# EAGLE board A6ECU-6 (EAGLE 7.5.0)
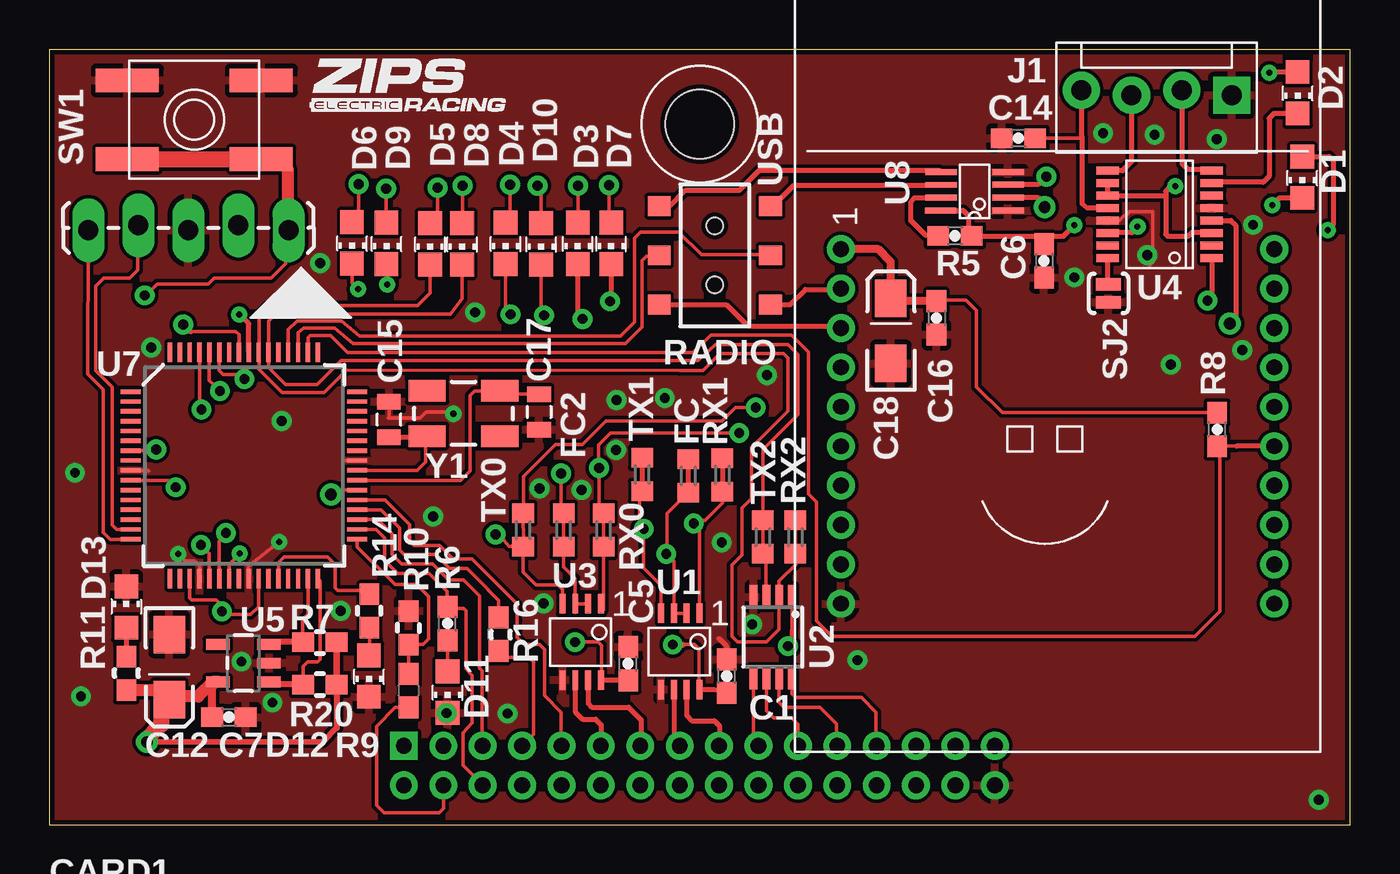
[diagram p0: board, top side]
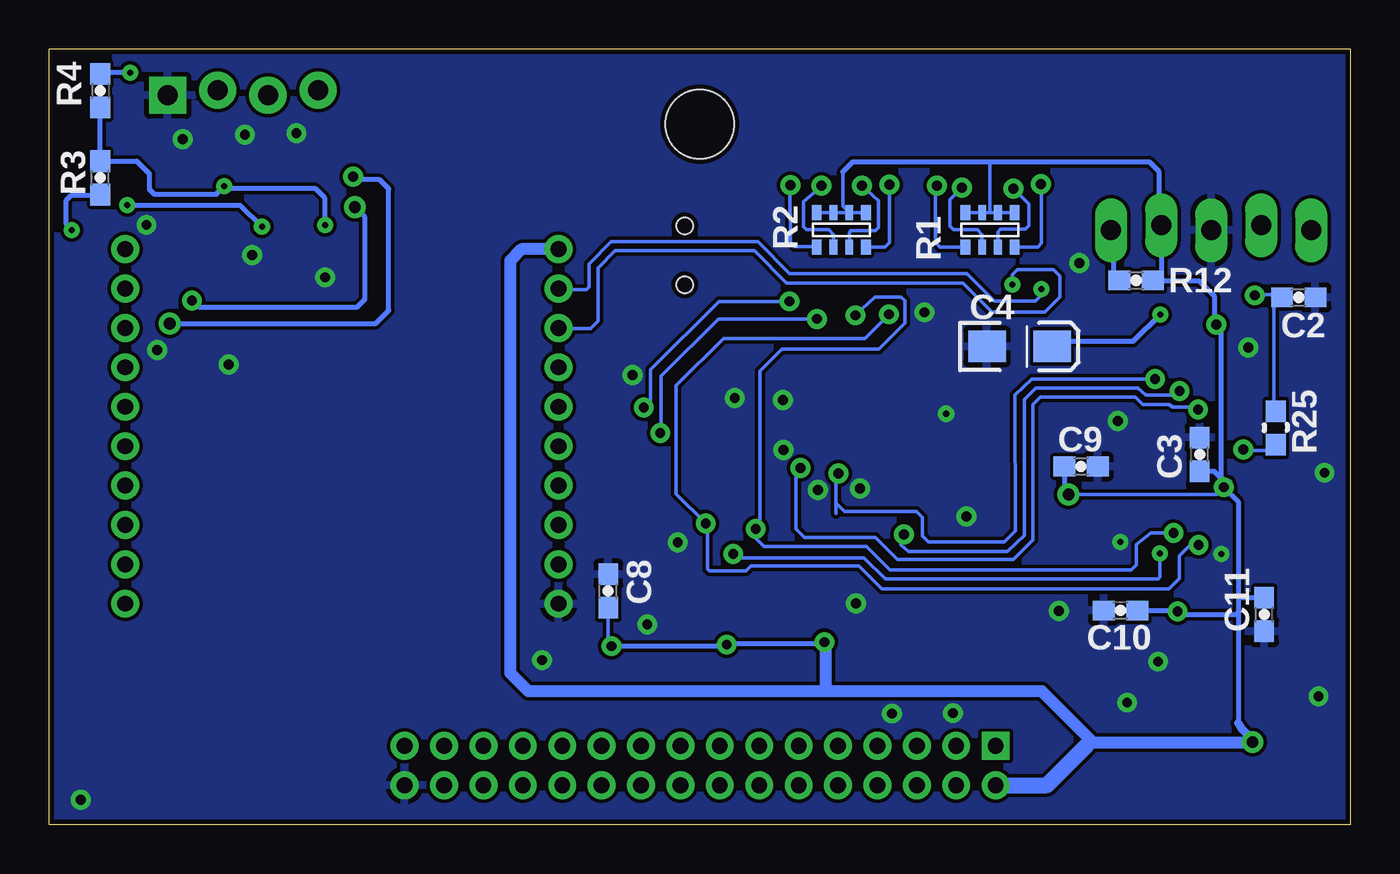
[diagram p1: board, bottom side, seen from below]

Size 66.04 x 39.37 mm. Coordinates in mm from the lower left corner, seen from the top.
Copper layers (1*16): Top 0.035mm / dielectric 1.5mm / Bottom 0.035mm
Design rules "SparkFun *": minimum track width 7mil, minimum drill 12mil, track to track 7mil, track to pad 7mil, pad to pad 7mil, via to via 7mil, smd to smd 7mil, copper to edge 10mil, drill to drill 8mil, minimum pad ring 12mil, minimum via ring 10mil, stop-mask expansion 4mil, vias tented up to drill 25mil, thermal gap 10mil

## Footprints (pad centres in the part's own frame; a part is rotated, then mirrored left to right if it is on the bottom)
0603 = smd 1.1 x 1: 1 -0.85,0; 2 0.85,0
EIA3216-16V = smd 1.9 x 1.6: A 1.65,0; C -1.65,0
0805 = smd 0.8 x 1.2: 1 -0.9,0; 2 0.9,0
CARD-2016 = drill 0.8 square: 1 18,4 | drill 0.8: 2 18,2; 3 20,4; 4 20,2; 5 22,4; 6 22,2; 7 24,4; 8 24,2; 9 26,4; 10 26,2; 11 28,4; 12 28,2; 13 30,4; 14 30,2; 15 32,4; 16 32,2; 17 34,4; 18 34,2; 19 36,4; 20 36,2; 21 38,4; 22 38,2; 23 40,4; 24 40,2; 25 42,4; 26 42,2; 27 44,4; 28 44,2; 29 46,4; 30 46,2; 31 48,4; 32 48,2 | hole 3.5: 33.02,35.56
CHIP_LED0805 = smd 1.2 x 1.2: A 0,-1.05; C 0,1.05
R0603 = smd 1 x 1.1: 1 -0.85,0; 2 0.85,0
1X05_LOCK_LONGPADS = drill 1.016 long: 1 0,0; 2 2.54,-0.254; 3 5.08,0; 4 7.62,-0.254; 5 10.16,0
MOLEX_1X4 = drill 1.016 pad 1.88 square: 1 -3.81,0.127 | drill 1.016 pad 1.88: 2 -1.27,-0.127; 3 1.27,0.127; 4 3.81,-0.127
MNR14 = smd 0.5 x 0.75: 1 -1.25,-0.9; 4 1.25,-0.9; 5 1.25,0.85; 8 -1.25,0.85 | smd 0.4 x 0.75: 2 -0.4,-0.9; 3 0.4,-0.9; 6 0.4,0.85; 7 -0.4,0.85
AYZ0202 = smd 1 x 1.15: 1 -2.5,2.825; 2 0,2.825; 3 2.5,2.825; 4 -2.5,-2.825; 5 0,-2.825; 6 2.5,-2.825 | hole 0.85: 1.5,0; -1.5,0
PAD-JUMPER-2-NO_YES_SILK = smd 0.635 x 1.27: 1 -0.45,0; 2 0.45,0
EVQ-Q2 = smd 3.2 x 1.2: A -3.4,-2; A' 3.4,-2; B -3.4,2; B' 3.4,2
MSOP-8 = smd 0.3 x 1: 1 -0.975,-1.95; 2 -0.325,-1.95; 3 0.325,-1.95; 4 0.975,-1.95; 5 0.975,1.925; 6 0.325,1.925; 7 -0.325,1.925; 8 -0.975,1.925
MSOP8 = smd 0.4 x 1.2: 1 -0.975,-2.05; 2 -0.325,-2.05; 3 0.325,-2.05; 4 0.975,-2.05; 5 0.975,2.05; 6 0.325,2.05; 7 -0.325,2.05; 8 -0.975,2.05
SSOP-16 = smd 0.419 x 1.143: 1 -2.223,-2.642; 2 -1.587,-2.642; 3 -0.953,-2.642; 4 -0.318,-2.642; 5 0.318,-2.642; 6 0.953,-2.642; 7 1.587,-2.642; 8 2.223,-2.642; 9 2.223,2.642; 10 1.587,2.642; 11 0.953,2.642; 12 0.318,2.642; 13 -0.318,2.642; 14 -0.953,2.642; 15 -1.587,2.642; 16 -2.223,2.642
SOT23-5 = smd 0.55 x 1.2: 1 -0.95,-1.3; 2 0,-1.3; 3 0.95,-1.3; 4 0.95,1.3; 5 -0.95,1.3
RM024-TH = drill 0.8: 1 9,11; 2 7,11; 3 5,11; 4 3,11; 5 1,11; 6 -1,11; 7 -3,11; 8 -5,11; 9 -7,11; 10 -9,11; 11 -9,-11; 12 -7,-11; 13 -5,-11; 14 -3,-11; 15 -1,-11; 16 1,-11; 17 3,-11; 18 5,-11; 19 7,-11; 20 9,-11
TQFP-64 = smd 0.22 x 1: 1 -3.75,-5.75; 2 -3.25,-5.75; 3 -2.75,-5.75; 4 -2.25,-5.75; 5 -1.75,-5.75; 6 -1.25,-5.75; 7 -0.75,-5.75; 8 -0.25,-5.75; 9 0.25,-5.75; 10 0.75,-5.75; 11 1.25,-5.75; 12 1.75,-5.75; 13 2.25,-5.75; 14 2.75,-5.75; 15 3.25,-5.75; 16 3.75,-5.75; 33 3.75,5.75; 34 3.25,5.75; 35 2.75,5.75; 36 2.25,5.75; 37 1.75,5.75; 38 1.25,5.75; 39 0.75,5.75; 40 0.25,5.75; 41 -0.25,5.75; 42 -0.75,5.75; 43 -1.25,5.75; 44 -1.75,5.75; 45 -2.25,5.75; 46 -2.75,5.75; 47 -3.25,5.75; 48 -3.75,5.75 | smd 1 x 0.22: 17 5.75,-3.75; 18 5.75,-3.25; 19 5.75,-2.75; 20 5.75,-2.25; 21 5.75,-1.75; 22 5.75,-1.25; 23 5.75,-0.75; 24 5.75,-0.25; 25 5.75,0.25; 26 5.75,0.75; 27 5.75,1.25; 28 5.75,1.75; 29 5.75,2.25; 30 5.75,2.75; 31 5.75,3.25; 32 5.75,3.75; 49 -5.75,3.75; 50 -5.75,3.25; 51 -5.75,2.75; 52 -5.75,2.25; 53 -5.75,1.75; 54 -5.75,1.25; 55 -5.75,0.75; 56 -5.75,0.25; 57 -5.75,-0.25; 58 -5.75,-0.75; 59 -5.75,-1.25; 60 -5.75,-1.75; 61 -5.75,-2.25; 62 -5.75,-2.75; 63 -5.75,-3.25; 64 -5.75,-3.75
VFSOP-8 = smd 0.3 x 1.6: 1 -0.98,-1.7; 2 -0.33,-1.7; 3 0.33,-1.7; 4 0.98,-1.7; 5 0.97,1.69; 6 0.325,1.7; 7 -0.33,1.7; 8 -0.98,1.71
CRYSTAL-SMD-5X3 = smd 1.9 x 1.1: 1 -1.85,-1.15; 2 1.85,-1.15; 3 1.85,1.15; 4 -1.85,1.15

## Placement (x,y rotation side)
C1  0.1UF  [0603]  34.39,7.54 90 top
C2  0.1UF  [0603]  2.62,26.77 0 bottom
C3  0.1UF  [0603]  7.65,18.8 90 bottom
C4  10UF  [EIA3216-16V]  16.79,24.28 0 bottom
C5  0.1UF  [0603]  29.39,8.18 90 top
C6  0.1UF  [0603]  50.5,28.63 270 top
C7  0.1UF  [0603]  9.12,5.46 0 top
C8  0.1UF  [0603]  37.67,11.86 90 bottom
C9  0.1UF  [0603]  13.67,18.19 0 bottom
C10  0.1UF  [0603]  11.66,10.87 180 bottom
C11  0.1UF  [0603]  4.37,10.67 90 bottom
C12  10UF  [EIA3216-16V]  6.1,8 270 top
C14  0.1UF  [0603]  49.2,34.85 180 top
C15  12PF  [0805]  17.25,20.57 90 top
C16  0.1UF  [0603]  45.03,25.73 270 top
C17  12PF  [0805]  24.87,20.96 270 top
C18  10UF  [EIA3216-16V]  42.72,25.07 90 top
CARD1  CARD-2016CARD  [CARD-2016]  0,0 0 top
D1  RED  [CHIP_LED0805]  63.6,32.87 180 top
D2  GREEN  [CHIP_LED0805]  63.37,37.16 180 top
D3  RED  [CHIP_LED0805]  26.82,29.51 180 top
D4  RED  [CHIP_LED0805]  23.16,29.51 180 top
D5  RED  [CHIP_LED0805]  19.33,29.49 180 top
D6  RED  [CHIP_LED0805]  15.37,29.54 180 top
D7  GREEN  [CHIP_LED0805]  28.52,29.51 180 top
D8  GREEN  [CHIP_LED0805]  20.95,29.49 180 top
D9  GREEN  [CHIP_LED0805]  17.12,29.51 180 top
D10  GREEN  [CHIP_LED0805]  24.97,29.49 180 top
D11  ORANGE  [CHIP_LED0805]  20.22,6.73 180 top
D12  AMBER  [CHIP_LED0805]  16.23,7.54 180 top
D13  GREEN  [CHIP_LED0805]  3.91,11.05 0 top
FC  TESTPOINT  [R0603]  32.44,17.7 90 top
FC2  TESTPOINT  [R0603]  26.11,14.96 90 top
ICSP  ICSP  [1X05_LOCK_LONGPADS]  12.14,30.18 180 top
J1  M4_1X4_LOCK  [MOLEX_1X4]  56.21,37.16 180 top
R1  RN-4_1K  [MNR14]  18.29,30.23 0 bottom
R2  RN-4_1K  [MNR14]  25.83,30.23 0 bottom
R3  1K  [0603]  63.45,32.84 90 bottom
R4  1K  [0603]  63.45,37.26 270 bottom
R5  1K  [0603]  45.97,29.9 0 top
R6  1K  [0603]  20.22,10.21 90 top
R7  2k  [0603]  13.74,9.27 0 top
R8  1K  [0603]  59.28,20.07 90 top
R9  30k  [0603]  18.24,6.81 270 top
R10  3k  [0603]  18.24,9.99 270 top
R11  499  [0603]  3.91,7.68 270 top
R12  10K  [0603]  10.87,27.64 0 bottom
R14  499  [0603]  16.26,10.85 90 top
R16  1k  [0603]  22.81,9.68 90 top
R20  2k  [0603]  13.74,7.11 0 top
R25  499  [0603]  3.78,20.14 270 bottom
RX0  TESTPOINT  [R0603]  28.14,14.96 90 top
RX1  TESTPOINT  [R0603]  34.16,17.75 90 top
RX2  TESTPOINT  [R0603]  37.87,14.61 90 top
S1  DPDT  [AYZ0202]  33.78,28.91 270 top
SJ2  [PAD-JUMPER-2-NO_YES_SILK]  53.77,26.97 90 top
SW1  SPST_TACT-EVQQ2  [EVQ-Q2]  7.37,35.79 180 top
TX0  TESTPOINT  [R0603]  24.05,14.96 90 top
TX1  TESTPOINT  [R0603]  30.1,17.78 90 top
TX2  TESTPOINT  [R0603]  36.22,14.61 90 top
U1  SN75HVD08DRMSOP  [MSOP-8]  32.03,8.79 180 top
U2  ISL83077MSOP  [MSOP8]  36.73,9.53 180 top
U3  SN75HVD08DRMSOP  [MSOP-8]  27.03,9.27 180 top
U4  FT230X  [SSOP-16]  56.36,30.99 90 top
U5  24LC00T-I/OT  [SOT23-5]  9.86,8.2 90 top
U6  RM024  [RM024-TH]  51.18,20.22 90 top
U7  DSPIC33EP256GM306  [TQFP-64]  9.88,18.24 270 top
U8  SN74LVC2G241  [VFSOP-8]  46.96,32.16 90 top
U$1  INDPK1  [PICKIT-PIN-1]  12.78,28.28 180 top
U$2  LOGO16-2-M  [2016-2-LOGO-M]  13.13,36.14 0 top
Y1  12Mhz  [CRYSTAL-SMD-5X3]  21.03,20.88 180 top

## Library data of the parts
C1-C3 C5-C11 C14 C16 = FSAE Electric; PARTNO: CC0603ZRY5V9BB104
C4 C12 C18 = FSAE Electric; PARTNO: T491A106M016AT
C15 C17 = FSAE Electric; PARTNO: CL21C120JBANNNC
CARD1 = FSAE Electric
D1 D3-D6 = FSAE Electric; PARTNO: LH R974-LP-1
D2 D7-D10 D13 = FSAE Electric; PARTNO: LTST-S220GKT
D11 = FSAE Electric; PARTNO: LTST-C170KFKT
D12 = FSAE Electric; PARTNO: HSMA-C170
FC FC2 RX0 RX1 RX2 TX1 TX2 = DFT2
ICSP = SparkFun-Connectors
J1 = FSAE Electric; PARTNO: 0022232041
R1 R2 = FSAE Electric; PARTNO: MNR14ERAPJ102
R3-R6 R8 = FSAE Electric; PARTNO: RC0603JR-071KL
R7 R20 = FSAE Eletric; PARTNO: ERJ-3EKF2001V
R9 = FSAE Eletric; PARTNO: RC0603FR-0730KL
R10 = FSAE Eletric; PARTNO: RC0603FR-0710KL
R11 R14 R25 = FSAE Eletric; PARTNO: RC0603FR-07499RL
R12 = FSAE Electric; PARTNO: RC0603FR-0710KL
R16 = FSAE Eletric; PARTNO: RC0603JR-071KL
S1 = SparkFun-Electromechanical; PARTNO: AYZ0202AGRLC; PROD_ID: SWCH-08179
SJ2 = SparkFun-Passives
SW1 = adafruit; PARTNO: EVQ-Q2F03W
TX0 = DFT2; PARTNO: 1625854-3
U1 U3 = FSAE Electric; PARTNO: ISL83072EIUZA-T
U2 = NASA_LIB; PARTNO: ISL83072EIUZA-T
U4 = FSAE Electric; PARTNO: FT230XS-R
U5 = FSAE Eletric; PARTNO: 24LC00T-I/OT
U6 U$1 = FSAE Eletric
U7 = FSAE Electric; PARTNO: DSPIC33EP256GM306-I/PT
U8 = FSAE Electric; PARTNO: SN74LVC2G241DCUR
U$2 = Pic
Y1 = SparkFun-FreqCtrl

## Nets
3V: C6.1 R3.2 R4.2 R5.2 U4.3 U4.10 U4.11 U8.8
+3V3: C1.1 C3.1 C5.1 C7.1 C8.1 C9.1 C10.1 C11.2 C12.A C16.1 C18.A CARD1.2 ICSP.2 R1.5 R1.6 R1.7 R1.8 R2.5 R2.6 R2.7 R2.8 R7.2 R8.2 R11.2 R12.2 R20.2 U1.8 U2.1 U3.8 U5.5 U6.1 U7.10 U7.19 U7.26 U7.38 U7.57
BRAKELIGHT: CARD1.5 U7.35
ECU-SS-IN: CARD1.4 R9.2
GND: C1.2 C2.2 C3.2 C4.C C5.2 C6.2 C7.2 C8.2 C9.2 C10.2 C11.1 C12.C C14.2 C15.2 C16.2 C17.2 C18.C CARD1.32 D11.C D12.C D13.C ICSP.3 J1.1 R10.1 SJ2.1 SW1.A SW1.A' U1.5 U2.4 U3.5 U4.5 U4.13 U5.2 U6.10 U7.9 U7.20 U7.25 U7.41 U8.1 U8.4
HORN: CARD1.7 R16.1
HORNEN: CARD1.9 U7.37
INRG: R8.1 U6.15 U7.50
N$1: D7.A R2.1
N$2: R14.2 U7.28
N$3: D13.A R11.1
N$4: D2.A R4.1
N$5: D3.A R2.2
N$6: D4.A R2.4
N$7: D10.A R2.3
N$8: D8.A R1.1
N$9: D5.A R1.2
N$10: D6.A R1.4
N$11: D9.A R1.3
N$12: D11.A R6.1
N$13: C15.1 U7.40 Y1.3
N$14: C17.1 U7.39 Y1.1
N$15: D12.A R14.1
N$16: R7.1 U5.3 U7.31
N$17: SJ2.2 U4.16
N$18: D1.A R3.1
N$19: D2.C U4.7
N$20: D1.C U4.14
N$21: U4.4 U8.3
N$22: C2.1 ICSP.1 R12.1 R25.1 SW1.B SW1.B'
N$24: U4.1 U8.2
N$28: J1.3 U4.9
N$32: R20.1 U5.1 U7.32
N$54: J1.2 U4.8
N$69: R5.1 U8.7
N$85: C14.1 J1.4 U4.12
N$87: R25.2 U7.7
N$88: C4.A U7.56
N$90: ICSP.4 U7.15
N$91: ICSP.5 U7.16
RS485-1-A: CARD1.11 U3.6
RS485-1-B: CARD1.13 U3.7
RS485-2-A: CARD1.15 U1.6
RS485-2-B: CARD1.17 U1.7
RS-TM-A: CARD1.25 U2.8
RS-TM-B: CARD1.23 U2.7
RS-TM-Y: CARD1.19 U2.5
RS-TM-Z: CARD1.21 U2.6
RTD-HORN: R16.2 U7.36
RX: S1.2 U7.52
RXD0: D3.C RX0.1 RX0.2 U3.1 U7.61
RXD1: D4.C RX1.1 RX1.2 U1.1 U7.21
RXD2: D5.C RX2.1 RX2.2 U2.2 U7.55
RXD3: S1.1 U8.6
RXD4: D6.C S1.3 U6.2
SS-D: R9.1 R10.2 U7.33
SS-ECU-RELAY: CARD1.6 R6.2 U7.34
TX: S1.5 U7.51
TXD0: D7.C TX0.1 TX0.2 U3.4 U7.60
TXD1: D10.C TX1.1 TX1.2 U1.4 U7.22
TXD2: D8.C TX2.1 TX2.2 U2.3 U7.54
TXD3: S1.4 U8.5
TXD4: D9.C S1.6 U6.3
U1-EN: FC.1 FC.2 U1.2 U1.3 U7.23
U3-EN: FC2.1 FC2.2 U3.2 U3.3 U7.59

## Tracks (layer width: path | path; a pad name or v marks a point on that pad's centre or on a via)
3V  (via drill 0.3)
  Top 0.178: C6.1 50.5,29.87
  Top 0.254: U8.8 46.4,31.18 46.66,30.91 46.66,30.07 | 46.66,30.07 46.66,30.06 R5.2 | v57.15,32.41 56.92,32.41 56.67,32.16 56.67,31.98 | 56.67,31.98 56.67,29.97 56.77,29.87 57.81,29.87 58.01,30.07 58.97,30.07 U4.3 | U4.10 U4.11 56.63,31.94 56.67,31.98 | 46.66,30.07 46.86,29.87 50.5,29.87 51.49,29.87 v52.04,30.43
  Bottom 0.254: R4.2 R3.2 61.61,33.69 60.96,33.05 60.96,32.26 60.71,32 57.56,32 v57.15,32.41 57.02,32.28 52.53,32.28 52.04,31.8 v52.04,30.43
+3V3  (via drill 0.5, 0.6)
  Top 0.178: v26.7,9.27 27.86,9.27 28.04,9.09 28.04,6.93 U3.8 | v6.41,17.13 6.06,17.49 U7.10 | U7.57 9.63,24.89 9.47,25.04 7.21,25.04 7.19,25.02 | U7.26 10.63,11.06 10.24,10.67 8.92,10.67 v8.76,10.82 8.76,11.13 8.48,11.4 7.24,11.4 7.14,11.51 U7.19 | U7.38 14.52,16.99 v14.3,16.76 | R8.2 48.38,20.92 47.07,22.23 47.07,26.11 46.53,26.64 45.1,26.64 C16.1 | 32.16,9.14 32.77,9.14 32.99,8.92 32.99,6.87 U1.8 | U2.1 37.7,10.46 37.74,10.41
  Top 0.254: v37.49,9.07 37.72,9.37 37.74,10.41 | 7.19,25.02 v6.81,25.4 | C1.1 33.76,6.86 U1.8 | 28.02,7.25 U3.8 28.02,7.33 C5.1
  Top 0.305: R20.2 R7.2 14.59,4.91 13.87,4.19 5.28,4.2 | v31.65,9.14 32.16,9.14
  Top 0.406: C16.1 42.86,26.58 C18.A 42.72,28.58 42.08,29.22 U6.1 | C7.1 8.27,6.97 U5.5 | 5.28,4.2 4.96,4.2 v4.96,4.19
  Top 0.61: R11.2 5.69,6.83 5.69,6.75 C12.A 6.25,6.5 7.57,6.5 8.32,7.25 U5.5 | 40.24,29.16 U6.1
  Top 0.813: 5.69,6.83 5.69,5.09 4.79,4.19 v4.96,4.19
  Bottom 0.178: 8.92,10.67 v8.76,10.82 | v6.41,17.13 6.41,17.59 6.58,17.75 | 6.1,17.45 v6.41,17.13 | v14.3,16.76 6.78,16.76 v6.41,17.13 | C8.1 37.67,9.25 v37.49,9.07 | R2.5 R2.6 | R2.8 R2.7 R2.6 | 25.76,33.15 25.76,31.4 R2.6 | R1.5 R1.6 18.28,31.08 | 18.28,31.08 R1.7 R1.8 | 18.28,31.08 18.29,31.09 18.29,33.66
  Bottom 0.254: v37.49,9.07 31.72,9.07 v31.65,9.14 | 31.6,9.19 26.77,9.19 v26.7,9.27 | 25.76,33.15 25.25,33.66 18.29,33.66 10.21,33.66 9.73,33.17 9.73,30.56 ICSP.2 9.6,27.71 9.94,27.71 R12.2 10,27.61 7.67,27.61 6.91,26.85 6.91,25.5 v6.81,25.4 6.58,25.17 6.58,17.75 6.58,17.6 | 6.58,17.6 6.58,17.3 v6.41,17.13 5.69,16.41 5.69,11.68 | 5.69,11.68 5.69,10.77 | 5.69,10.77 5.69,5.16 | 7.04,4.19 v4.96,4.19 | 8.92,10.67 5.79,10.67 5.69,10.77 | C11.2 5.52,11.52 5.69,11.68 | C10.1 8.81,10.87 v8.76,10.82 | C3.1 6.92,17.95 6.58,17.6 | C9.1 14.52,16.98 v14.3,16.76
  Bottom 0.305: 26.64,9.32 v26.7,9.27 | 31.6,9.19 v31.65,9.14
  Bottom 0.406: 4.74,4.18 4.72,4.19 | 5.69,5.16 5.53,4.9 5.27,4.64 4.93,4.22 v4.96,4.19
  Bottom 0.61: U6.1 42.08,29.22 42.65,28.65 42.65,7.7 41.73,6.78 26.67,6.78 | 26.67,6.78 15.67,6.78 13.14,4.25 | 13.14,4.25 13.08,4.19 v4.96,4.19 4.72,4.19 | 26.64,9.32 26.64,6.81 26.67,6.78 | 13.4,4 13.14,4.25
  Bottom 0.813: CARD1.2 15.4,2 13.4,4
BRAKELIGHT
  Top 0.178: U7.35 16.67,15.49 17.4,14.76 17.4,13.72 17.88,13.23 19.46,13.23 20.27,12.42 21.03,12.42 21.84,11.61 21.84,7.92 21.97,7.8 21.97,4.03 CARD1.5
ECU-SS-IN
  Top 0.178: R9.2 17.57,5.96 16.61,5 16.61,0.99 16.99,0.61 19.79,0.61 20.02,0.84 20.02,1.98 CARD1.4
GND  (via drill 0.3, 0.33, 0.5)
  Top 0.178: U7.41 14.94,18.49 | U7.9 5.03,17.99 5.05,17.96 | U7.20 7.63,13.15 7.39,13.39 6.91,13.39 v6.55,13.74 | U7.25 10.11,13.1 v11.66,14.35 | U4.13 54.32,30.67 54.56,30.91 54.66,30.91 54.86,31.12 56.01,31.12 56.01,28.58 55.83,28.4 | C15.2 17.25,20.7 17.2,20.65 18.82,20.65 19.13,20.96 20.42,20.96 v20.52,20.85
  Top 0.254: C1.2 34.39,9.04 33.99,9.45
  other vias: 9.75,8.28 1.31,17.87 19.48,15.65 11.79,20.49 5.18,24.23 41.02,8.36 28.8,21.56 23.27,5.64 14.78,10.85 11.33,6.2 64.44,1.27 1.61,6.51 31.24,21.67 36.42,22.83 24.89,17.07 27.03,16.99 28.78,19.02 56.11,35.03 53.49,35.1 52.04,27.79 61.11,30.45 59.26,34.8 34.14,14.33 35.69,10.16 13.75,28.51 21.62,26.01 25.1,11.23 20.17,5.66 55.75,28.92 60.57,24.09 56.93,23.37
  pour Top (rank 4): 67.41,-1.12 67.46,41.81 -1.6,41.78 -1.4,-1.19
  pour Bottom (rank 4): 67.97,-0.3 68.2,40.72 -2.9,40.44 -2.79,-0.62
HORN
  Top 0.178: R16.1 22.92,8.83 23.27,8.48 24.36,8.48 24.59,8.26 24.59,4.59 CARD1.7
HORNEN
  Top 0.178: U7.37 17.04,16.49 18.29,15.24 18.29,14.4 18.52,14.17 19.81,14.17 20.5,13.49 21.46,13.49 23.75,11.2 23.75,9.5 24.1,9.14 24.89,9.14 25.15,8.89 25.15,6.55 25.98,5.72 25.98,4.02 CARD1.9
INRG
  Top 0.178: 60.27,19.22 R8.1 59.41,19.09 59.41,10.82 58.14,9.55 39.73,9.55 38.94,10.34 38.94,16.38 38.53,16.79 38.53,24 37.67,24.87 33.58,24.87 32.69,23.98 15.14,23.98 14.27,24.84 13.23,24.84 13.13,24.74 U7.50
  Top 0.254: U6.15 60.27,19.22
N$1  (via drill 0.5)
  Top 0.178: v28.42,32.46 28.42,31
  Top 0.254: 28.42,31 28.42,30.67 D7.A
  Bottom 0.178: v28.42,32.46 28.45,32.44 28.42,29.57 28.2,29.35 27.34,29.35 R2.1
N$2
  Top 0.178: R14.2 16.31,11.58 16,11.89 14.63,11.89 14.5,12.01 14.5,13.21 14.12,13.59 11.91,13.59 11.63,13.31 U7.28
N$3
  Top 0.254: D13.A R11.1
N$4  (via drill 0.3)
  Top 0.254: D2.A 61.96,38.21 v61.93,38.18
  Bottom 0.254: v61.93,38.18 63.38,38.18 R4.1
N$5  (via drill 0.5)
  Top 0.178: v26.85,32.44 26.85,31.17
  Top 0.254: 26.85,31.17 26.85,30.59 D3.A
  Bottom 0.178: v26.85,32.44 26.92,32.36 26.92,32.33 27.76,31.62 27.76,30.35 27.61,30.2 26.47,30.2 26.23,29.97 R2.2
N$6  (via drill 0.5)
  Top 0.178: v23.39,32.49 23.39,30.79 D4.A
  Bottom 0.178: R2.4 23.61,29.33 23.39,29.54 v23.39,32.49
N$7  (via drill 0.5)
  Top 0.178: 24.8,32.42 v24.79,32.44 24.97,32.26 D10.A
  Bottom 0.178: 24.79,32.36 v24.79,32.44 23.95,31.67 23.95,30.3 24.1,30.15 25.37,30.15 25.43,30.09 R2.3
N$8  (via drill 0.5)
  Top 0.178: v20.98,32.44 20.98,30.56 D8.A
  Bottom 0.178: 21.01,32.41 v20.98,32.44 21.06,32.36 21.06,29.57 20.82,29.33 R1.1
N$9  (via drill 0.5)
  Top 0.178: v19.71,32.33 19.71,30.92 D5.A
  Bottom 0.178: 19.79,32.26 v19.71,32.33 20.32,31.72 20.32,30.38 20.14,30.2 18.92,30.2 18.69,29.97 R1.2
N$10  (via drill 0.5)
  Top 0.178: v15.7,32.51 15.7,30.87 15.72,30.84 15.72,30.58 15.71,30.59 D6.A
  Bottom 0.178: 15.72,32.49 v15.7,32.51 15.67,32.49 15.67,29.51 15.86,29.33 R1.4
N$11  (via drill 0.5)
  Top 0.178: v17.09,32.28 17.09,30.87
  Top 0.61: 17.09,30.87 17.15,30.56 D9.A
  Bottom 0.178: 16.87,32.05 v17.09,32.28 16.31,31.5 16.31,30.4 16.48,30.23 17.75,30.23 17.89,30.09 R1.3
N$12
  Top 0.178: R6.1 D11.A
N$13
  Top 0.178: 19.12,19.67 Y1.3 19.1,19.65 19.1,18.42 18.67,17.99 U7.40
  Top 0.254: C15.1 19.18,19.67 Y1.3
N$14
  Top 0.178: U7.39 20.89,17.49 21.36,17.96 21.36,21.79 21.59,22.02 Y1.1 23.05,21.86 C17.1
N$15
  Top 0.178: R14.1 16.26,8.62 D12.A
N$16
  Top 0.178: R7.1 12.85,9.31 12.85,10.41 13.13,10.69 U7.31
  Top 0.305: R7.1 11.27,9.27 U5.3
N$17
  Top 0.254: U4.16 53.72,27.48 SJ2.2
N$18  (via drill 0.3)
  Top 0.254: D1.A 64.96,33.92 65.18,33.71 65.18,30.45 v64.9,30.18
  Bottom 0.254: v64.9,30.18 64.9,30.2 65.18,30.48 65.18,31.7 64.92,31.95 63.49,31.95 R3.1
N$19
  Top 0.254: D2.C 62.17,36.11 61.93,35.86 61.93,32.92 61.62,32.61 59.04,32.61 U4.7
N$20  (via drill 0.3)
  Top 0.254: D1.C 62.45,31.82 v62.08,31.45 | v55.25,30.35 55.25,30.33 54.97,30.05 53.73,30.05 U4.14
  Bottom 0.254: v62.08,31.45 56.34,31.45 v55.25,30.35
N$21  (via drill 0.5, 0.6)
  Top 0.254: U4.4 59.99,30.67 60.22,30.44 60.22,25.74 v59.93,25.44 | v50.62,32.89 50.6,32.89 50.2,32.5 48.68,32.5 U8.3
  Bottom 0.254: v59.93,25.44 49.47,25.44 48.81,26.1 48.81,32.29 49.26,32.75 50.47,32.75 v50.62,32.89
N$22  (via drill 0.5)
  Top 0.178: v4.85,26.87 4.9,26.87 5.49,27.46 8.08,27.46 8.38,27.76 11.25,27.76 11.99,28.5 11.99,30.02 ICSP.1
  Top 0.61: SW1.B 11.63,33.79 12.09,33.32 12.09,30.23 ICSP.1
  Top 0.813: SW1.B' SW1.B
  Bottom 0.178: 4.8,26.92 4.04,26.92 3.89,26.77 3.89,21.09 R25.1 3.82,20.99 3.86,21.03
  Bottom 0.254: 4.8,26.92 v4.85,26.87 | C2.1 3.89,26.77 | R12.1 11.72,27.67 11.81,27.76 11.84,27.76 11.99,27.91 11.99,30.02 ICSP.1
N$24  (via drill 0.5, 0.6)
  Top 0.254: U4.1 59,26.82 v58.79,26.61 | v50.53,31.36 50.53,31.5 50.2,31.83 U8.2
  Bottom 0.254: v58.79,26.61 58.76,26.61 58.45,26.29 50.41,26.29 50.01,26.68 50.01,30.84 v50.53,31.36
N$28
  Top 0.254: U4.9 53.73,33.2 54.48,33.2 54.97,33.68 54.97,37.01 J1.3
N$32
  Top 0.178: R20.1 12.89,8.04 13.11,8.26 13.61,8.26 13.74,8.38 13.74,12.38 U7.32
  Top 0.305: R20.1 11.3,7.11 U5.1
N$54
  Top 0.254: U4.8 58.94,33.27 57.79,33.27 57.51,33.55 57.51,37.26 J1.2
N$69
  Top 0.254: R5.1 44.48,29.92 43.74,30.66 43.74,31.6 43.92,31.83 45.24,31.83 U8.7
N$85
  Top 0.178: C14.1 52.35,34.85 52.43,34.93
  Top 0.254: U4.12 53.58,31.32 52.68,31.32 52.43,31.52 52.43,34.93 52.43,37.26 J1.4
N$87  (via drill 0.5)
  Top 0.178: v5.44,19.05 5.38,19 4.14,19 U7.7
  Bottom 0.178: R25.2 3.83,19.29 U7.7 5.37,18.99 v5.44,19.05
N$88  (via drill 0.3)
  Top 0.254: U7.56 10.13,25.43 v9.65,25.91
  Bottom 0.254: v9.65,25.91 11.02,24.54 15.14,24.54 C4.A
N$90
  Top 0.178: ICSP.4 4.5,28.17 4.09,27.76 2.77,27.76 2.36,27.36 2.36,23.06 3.2,22.23 3.2,15.21 3.43,14.99 U7.15
N$91
  Top 0.178: ICSP.5 1.96,22.89 2.74,22.1 2.74,14.83 3.1,14.48 U7.16
RS485-1-A
  Top 0.254: U3.6 26.7,5.74 27.08,5.36 27.74,5.36 28.02,5.08 28.02,4.02 CARD1.11
RS485-1-B
  Top 0.254: U3.7 27.35,6.15 27.53,5.97 29.41,5.97 30.05,5.33 30.05,4.05 CARD1.13
RS485-2-A
  Top 0.254: U1.6 31.7,4.3 CARD1.15
RS485-2-B
  Top 0.254: U1.7 32.35,5.54 32.61,5.28 33.76,5.28 34.01,5.03 34.01,4.01 CARD1.17
RS-TM-A
  Top 0.178: U2.8 37.7,6.65 37.9,6.45 41.22,6.45 41.96,5.72 41.96,4.04 CARD1.25
RS-TM-B
  Top 0.178: U2.7 37.05,6.2 37.29,5.97 39.12,5.97 39.95,5.13 39.95,4.05 CARD1.23
RS-TM-Y
  Top 0.178: U2.5 35.75,4.25 CARD1.19
RS-TM-Z
  Top 0.178: U2.6 36.4,5.79 36.75,5.44 37.67,5.44 38,5.11 CARD1.21
RTD-HORN
  Top 0.178: R16.2 22.81,11.38 22.28,11.91 22.28,11.94 21.21,13 20.32,13 19.61,13.72 18.01,13.72 17.78,13.94 17.78,15.06 16.86,15.99 U7.36
RX
  Top 0.178: S1.2 36.58,28.93 33.1,28.93 31.95,30.07 30.02,30.07 29.72,29.77 29.72,25.53 29.01,24.82 15.75,24.82 14.83,25.58 12.57,25.58 12.13,25.14 U7.52
RXD0  (via drill 0.5)
  Top 0.178: 7.63,21.5 v7.72,21.08 7.63,21.17 U7.61 | 27.06,25.69 v27.08,25.68 | v35.03,19.89 28.5,19.89 27.89,19.28 27.89,18.14 v27.91,18.11 27.91,16.04 RX0.2 RX0.1 28.14,10.91 U3.1
  Top 0.254: D3.C 26.82,25.93 v27.08,25.68
  Bottom 0.178: v7.72,21.08 7.82,21.21 9.02,21.21 9.22,21.34 10.52,21.34 10.9,21.72 15.72,21.72 16.1,21.34 16.1,14.45 17.09,13.46 22.99,13.46 24.1,14.58 27.71,14.58 28.14,15.01 28.14,17.88 v27.91,18.11 | v27.08,25.68 32.08,25.68 34.98,22.78 34.98,19.94 v35.03,19.89
RXD1  (via drill 0.5)
  Top 0.178: RX1.1 34.16,16.33 33.27,15.44 32.87,15.44 v32.72,15.29 | 32.62,15.2 v32.72,15.29 | v7.7,14.2 8.13,13.76 U7.21 | D4.C 23.16,26.16 23.4,25.92 v23.42,25.91 | U1.1 33,15 v32.72,15.29
  Top 0.254: RX1.2 RX1.1
  Bottom 0.178: v32.72,15.29 32.72,15.42 | v7.7,14.2 8.13,14.2 8.69,13.64 8.69,12.5 9.22,11.96 23.77,11.96 24.94,13.13 30.43,13.13 30.68,12.88 32.52,12.88 32.62,12.98 32.62,15.2 v32.72,15.29 | v23.42,25.91 24.64,24.69 31.83,24.69 34.21,22.3 34.21,16.79 v32.72,15.29
RXD2
  Top 0.178: 10.64,24 10.64,23.11 11.81,21.95 13.94,21.95 15.09,23.09 32.03,23.07 33.12,23.06 33.17,23.06 34.04,23.93 37.26,23.93 37.49,23.7 37.49,21.01 35.64,19.15 35.64,16.56 35.15,16.08 35.15,13.69 34.65,13.18 34.65,9.55 34.93,9.27 36.4,9.27 37.05,9.93 U2.2 | RX2.2 RX2.1 37.9,13.73 37.9,13.21 37.05,12.36 U2.2 | 37.03,11.55 U2.2 | D5.C 19.33,27 18.69,26.37 11.05,26.37 10.64,25.96 10.64,24 | 10.64,24 U7.55
RXD3
  Top 0.254: S1.1 36.74,31.41 37.8,32.46 45.24,32.46 U8.6
RXD4  (via drill 0.3)
  Top 0.178: D6.C 15.37,27.51 v15.67,27.2
  Top 0.254: S1.3 37.61,26.41 38.38,27.18 40.14,27.18 U6.2
  Bottom 0.178: U6.2 40.14,27.18 38.76,27.18 38.63,27.31 38.63,28.47 37.52,29.59 30.07,29.59 28.47,27.99 19.46,27.99 18.06,26.59 15.98,26.59 15.67,26.9 v15.67,27.2
SS-D
  Top 0.178: R9.1 R10.2 18.97,9.14 19.25,9.42 19.25,11.58 18.64,12.19 17.55,12.19 15.63,14.11 U7.33
SS-ECU-RELAY
  Top 0.178: U7.34 16.59,14.99 17.02,14.55 17.02,13.41 17.68,12.75 19.28,12.75 20.19,11.84 20.19,10.86 R6.2 | R6.2 20.22,10.95 | R6.2 20.28,10.97 21.03,10.97 21.16,10.85 21.16,7.9 21.47,7.59 21.47,5.16 21,4.66 21,3.01 CARD1.6
TX
  Top 0.178: S1.5 30.93,28.88 30.33,28.88 30.1,28.65 30.1,25.27 29.26,24.43 15.42,24.43 14.48,25.22 12.9,25.22 12.63,24.98 U7.51
TXD0  (via drill 0.5)
  Top 0.178: v8.66,22.02 8.59,22.15 8.13,22.55 U7.60 | 24.04,14.12 TX0.1 | v22.66,14.73 22.82,14.73 23.34,14.12 | 23.34,14.12 TX0.1 | 23.34,14.12 24.08,14.27 TX0.2 24.08,15.84 24.08,17.68 25.7,19.3 27.08,19.3 28.27,20.5 34.14,20.5 34.82,21.18 v35.86,21.18 | 28.49,26.59 v28.47,26.57 | TX0.1 24.05,12.83 24.71,12.17 25.83,12.17 26.06,11.94 26.06,10.77 U3.4
  Top 0.254: D7.C 28.52,26.62 v28.47,26.57
  Bottom 0.178: v8.66,22.02 8.97,21.82 10.39,21.82 10.77,22.17 15.95,22.17 16.54,21.59 16.54,14.68 17.4,13.87 22.43,13.87 22.81,14.2 22.81,14.58 v22.66,14.73 | v28.47,26.57 32.05,26.57 35.51,23.11 35.51,21.54 v35.86,21.18
TXD1  (via drill 0.5)
  Top 0.178: 8.89,14.71 8.63,14.4 U7.22 | 8.94,14.76 8.89,14.71 | 8.89,14.71 v8.97,14.81 | v30.18,15.01 30.18,13.03 31.06,12.14 31.06,10.75 U1.4 | 30,15.19 v30.18,15.01 | 24.83,26.14 v25.12,25.86 24.97,26.01 D10.C | TX1.1 30.05,16.69 29.97,16.61 29.97,15.21 v30.18,15.01
  Top 0.254: TX1.2 TX1.1
  Bottom 0.178: v8.97,14.81 10.13,14.81 10.85,14.22 10.85,13.18 11.1,12.93 23.37,12.93 24.56,14.12 29.77,14.12 30.18,14.53 v30.18,15.01 29.97,15.21 29.97,23.04 28.85,24.16 23.93,24.16 22.61,25.48 22.61,26.62 22.81,26.8 24.13,26.8 25.12,25.88 v25.12,25.86
TXD2
  Top 0.178: U2.3 36.37,11.61 36.37,13.39 36.22,13.54 TX2.1 TX2.2 36.22,19.05 38,20.83 38,23.88 37.49,24.38 33.81,24.38 32.94,23.57 14.81,23.57 13.59,22.35 11.99,22.35 11.13,23.21 U7.54 11.13,25.58 11.48,25.93 20.37,25.93 20.96,26.72 D8.C
TXD3
  Top 0.254: S1.4 31.51,31.41 32.31,32.21 35.03,32.21 36.04,33.22 45.18,33.22 U8.5
TXD4  (via drill 0.3)
  Top 0.178: 17.14,27.63 v17.15,27.43 D9.C
  Top 0.254: S1.6 34.38,26.41 35.46,25.32 40.03,25.32 U6.3
  Bottom 0.178: 40.05,25.35 U6.3 40.16,25.2 38.56,25.2 38.18,25.58 38.18,28.27 37.31,29.13 30.25,29.13 28.63,27.51 19.66,27.51 18.19,26.04 15.49,26.04 14.73,26.8 14.73,27.86 15.06,28.19 16.89,28.19 17.15,27.94 v17.15,27.43
U1-EN  (via drill 0.3, 0.5)
  Top 0.178: v9.68,13.77 9.13,13.22 U7.23 | FC.1 32.11,16.54 31.37,15.8 31.37,13.79 v31.32,13.74 31.7,13.36 U1.3 U1.2
  Top 0.254: FC.2 FC.1
  Bottom 0.178: v9.68,13.77 9.68,12.57 9.75,12.47 23.6,12.47 24.69,13.54 31.12,13.54 v31.32,13.74
U3-EN  (via drill 0.5)
  Top 0.178: v9.91,22.63 9.68,22.86 8.84,22.86 8.63,23.07 U7.59 | v25.98,17.83 25.98,15.94 FC2.2 FC2.1 26.11,13.08 26.7,12.5 26.7,10.77 U3.3 U3.2
  Bottom 0.178: v9.91,22.63 16.15,22.63 17.02,21.82 16.99,14.91 17.55,14.35 21.41,14.35 21.72,14.66 21.72,15.6 22.02,15.9 25.68,15.9 26.11,16.33 | FC2.2 26.11,16.33 | 26.11,16.33 26.11,17.7 v25.98,17.83

## Text on the board
tPlace: USB | RADIO